# Altium PCB 2017-04-15_19-23-01.PcbDoc
Units mil, origin at the board's own origin, x right, y up, seen from the top; angles counter-clockwise.
Board outline 1785 x 1770 mil, 4 copper layers (Top Layer, MidLayer1, MidLayer2, Bottom Layer); 20 components, 13 nets, 47 pads, 26 vias.
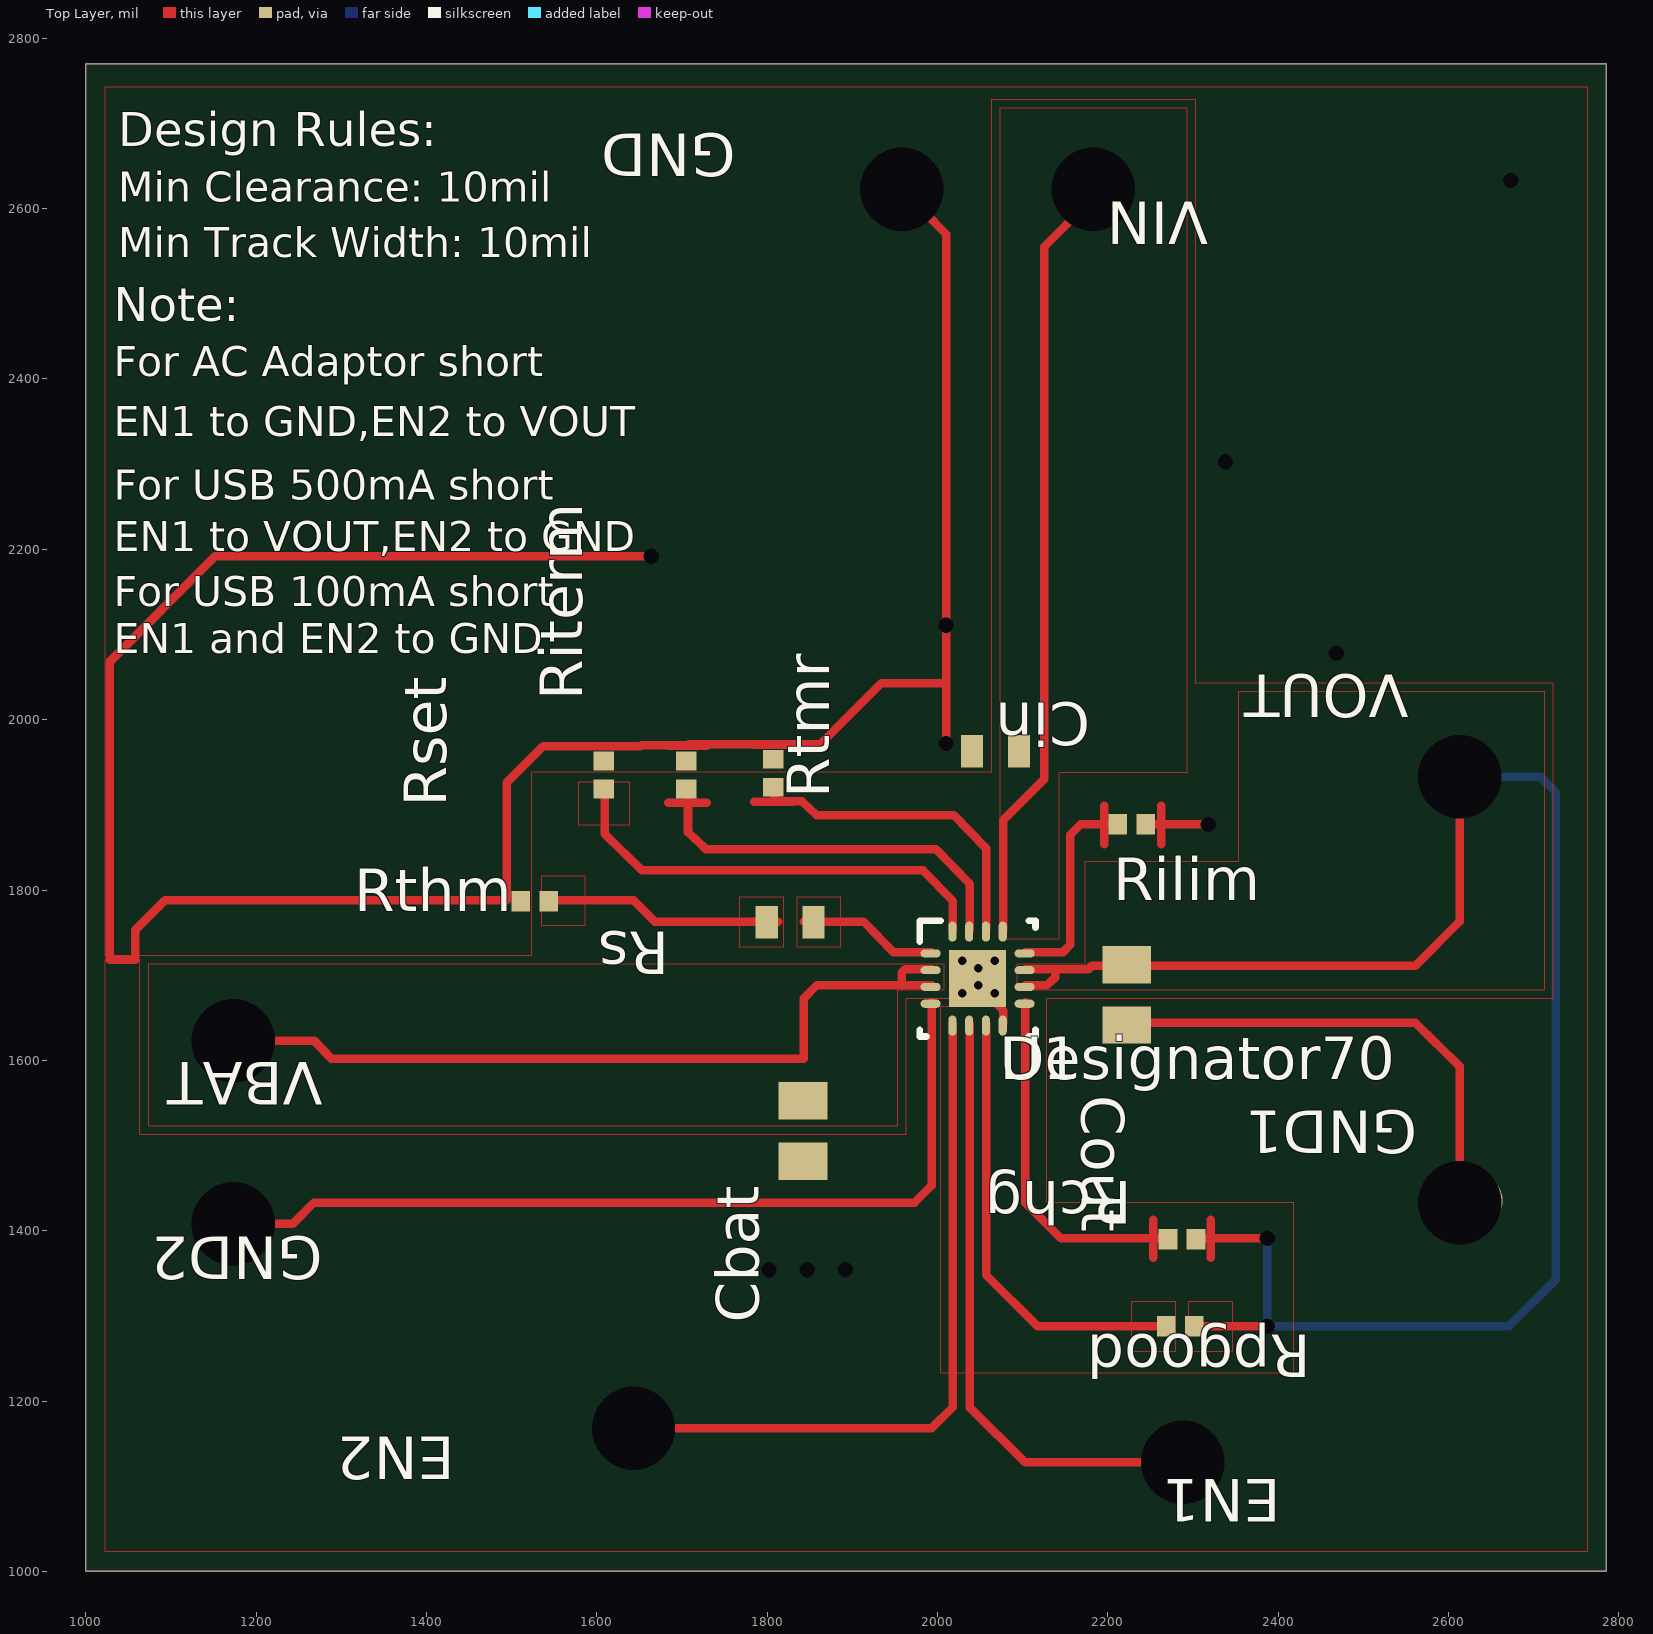
[diagram p0: Top Layer view]
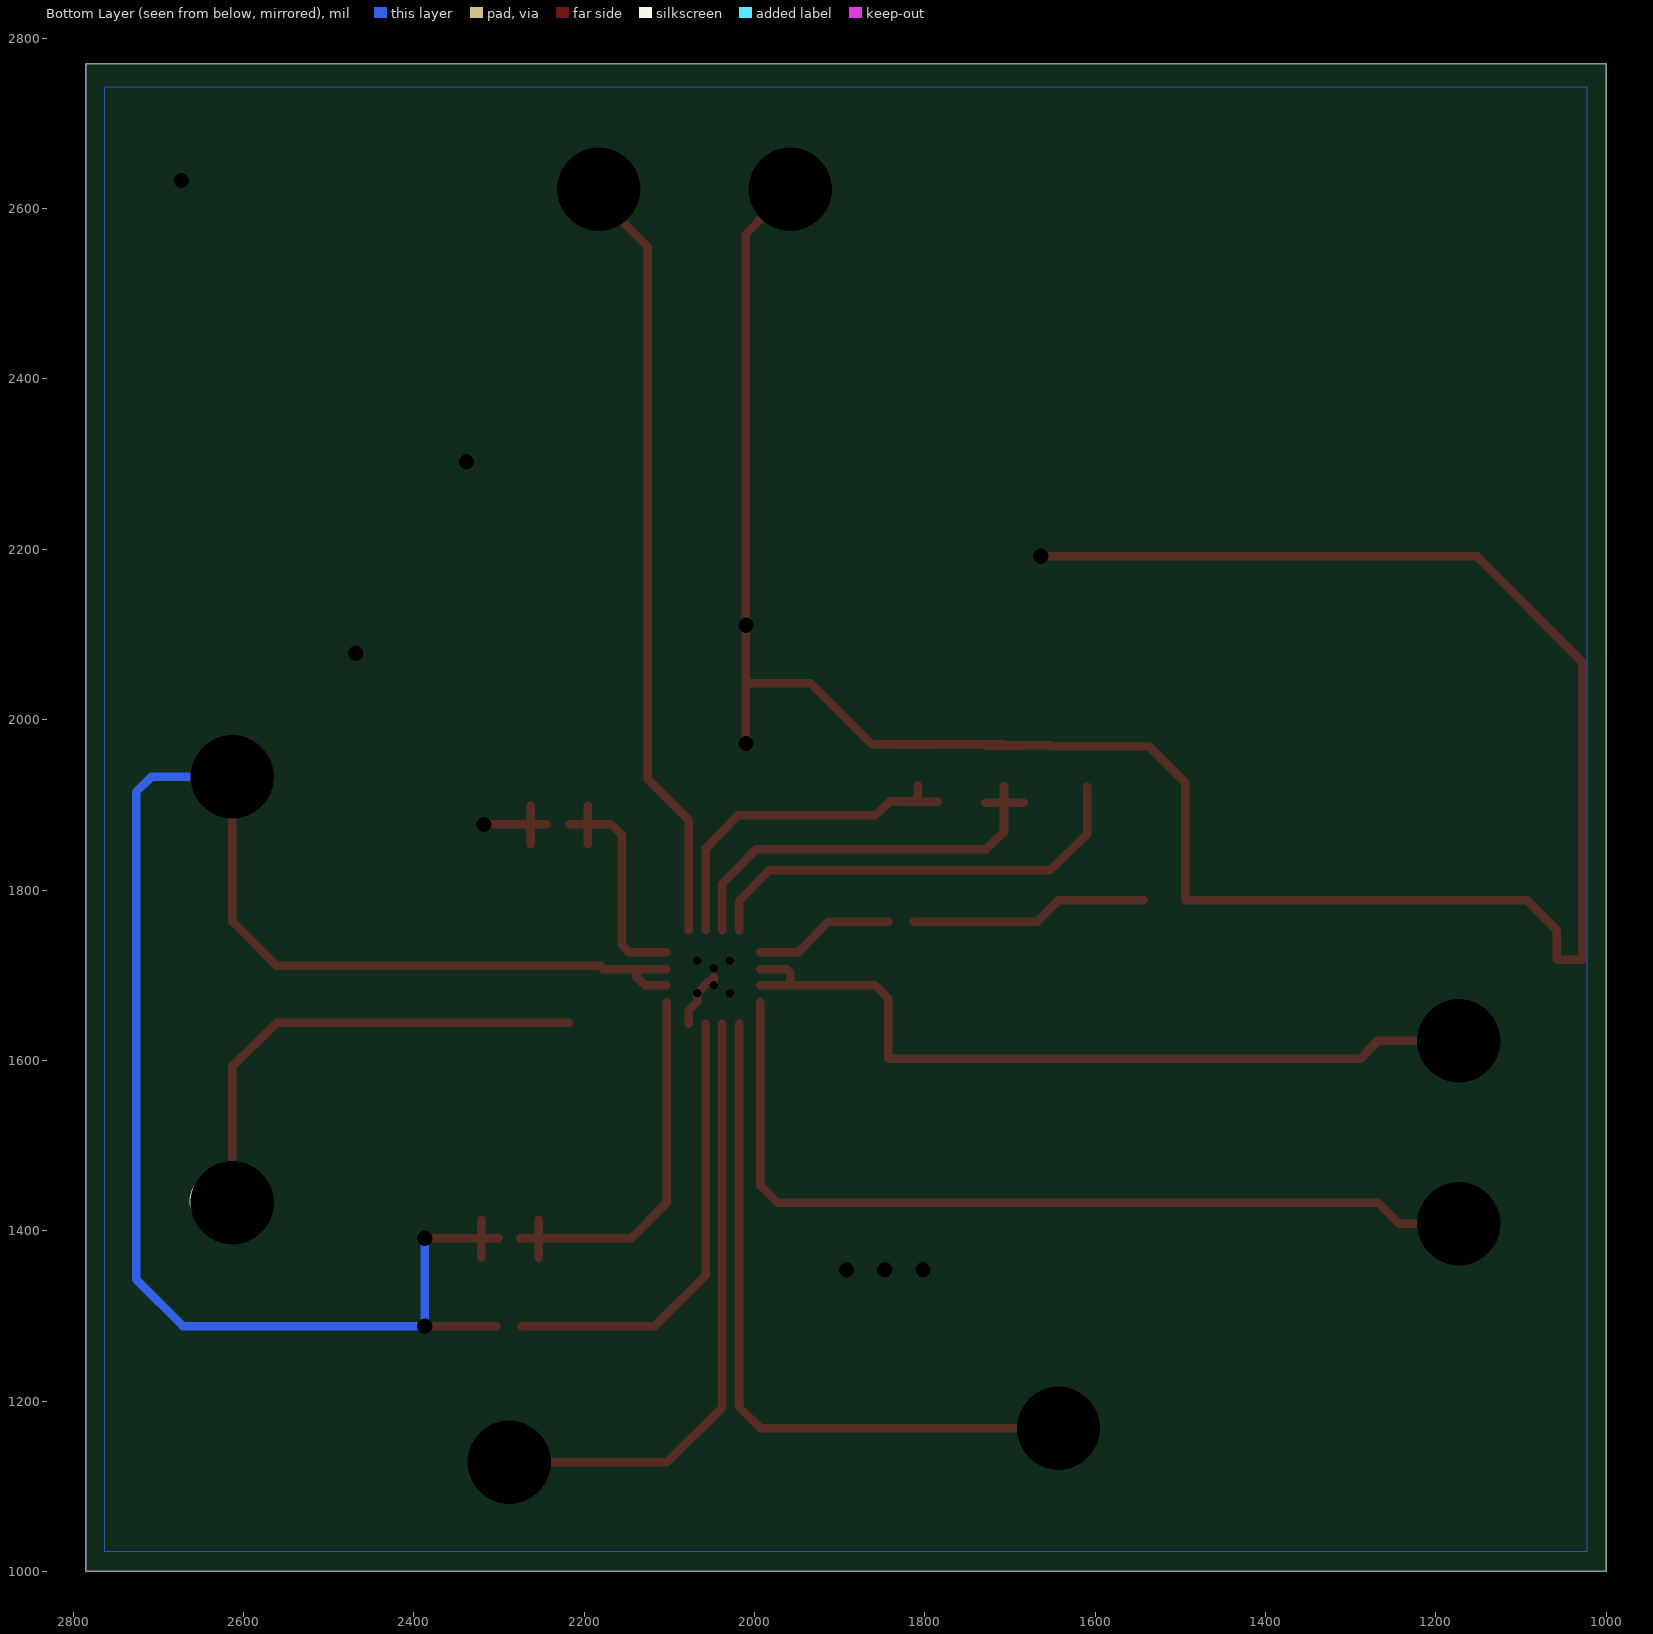
[diagram p1: Bottom Layer view, seen from below]

## Layer stack, top to bottom
Top Layer: signal copper 1.4
Dielectric: core 12.6, FR-4, Dk 4.8
MidLayer1: signal copper 1.4
Dielectric: prepreg 12.6, FR-4, Dk 4.8
MidLayer2: signal copper 1.4
Dielectric: core 12.6, FR-4, Dk 4.8
Bottom Layer: signal copper 1.4

## Board outline
1000,1000 2785,1000 2785,2770 1000,2770

## Design rules (kind name [scope] priority, off if disabled: settings)
PlaneConnect [All] p0: scope1count=1 scope1_0_kind=Board scope1_0_value=Board scope2count=1 scope2_0_kind=Board scope2_0_value=Board commentlength=0 planeconnectstyle=Direct reliefexpansion=20 reliefentries=4 reliefconductorwidth=10 reliefairgap=10
PlaneConnect [All] p1: planeconnectstyle=Direct reliefexpansion=20 reliefentries=4 reliefconductorwidth=10 reliefairgap=10
PolygonConnect [All] p0: scope1count=1 scope1_0_kind=Board scope1_0_value=Board scope2count=1 scope2_0_kind=Board scope2_0_value=Board commentlength=0 connectstyle=Direct reliefconductorwidth=10 reliefentries=4 polygonreliefangle="90 Angle"
PolygonConnect [All] p1: connectstyle=Direct reliefconductorwidth=10 reliefentries=4 polygonreliefangle="90 Angle"

## Components (designator, comment, footprint, x,y, rotation, side; value= is the part's Value field where it differs from the comment)
Cbat "" 0805 1842,1517 r90 top
Cin "" 0603 2068,1963 r180 top
Cout "" 0805 2222,1677 r270 top
EN1 "" TP-1502 2288,1122 r180 top
EN2 "" TP-1502 1638,1162 r180 top
GND "" TP-1502 1957,2622 r180 top
GND1 "" TP-1502 2631,1435 r180 top
GND2 "" TP-1502 1166,1407 r180 top
Rchg "" 0402 2287,1390 r180 top
Rilim "" 0402 2228,1877 r0 top
Riterm "" 0402 1705,1935 r90 top
Rpgood "" 0402 2285,1288 r180 top
Rs "" 0603 1827,1762 r180 top
Rset "" 0402 1608,1935 r90 top
Rthm "" 0402 1527,1787 r0 top
Rtmr "" 0402 1807,1937 r90 top
U1 "" RGT0016C 2047,1696 r0 top
VBAT "" TP-1502 1172,1622 r180 top
VIN "" TP-1502 2182,2622 r180 top
VOUT "" TP-1502 2612,1932 r180 top

## Footprints (in the part's own frame and the unit in brackets; to place one, negate y for a bottom-side part, rotate by r counter-clockwise, add the part's x,y. Pads: shape width x height; smd on the part's side, far side on the other; paste and mask are expansions set on the pad)
0402 [mil]
  rect 22x24 smd: 1(-16.5,0) 2(16.5,0)
0603 [mil]
  rect 26x38 smd: 1(-27.5,0) 2(27.5,0)
0805 [mil]
  rect 44x57 smd: 1(-35.5,0) 2(35.5,0)
RGT0016C [mm]
  oval 0.6x0.24 smd: 1(-1.4,0.75) 2(-1.4,0.25) 3(-1.4,-0.25) 4(-1.4,-0.75) 9(1.4,-0.75) 10(1.4,-0.25) 11(1.4,0.25) 12(1.4,0.75)
  oval 0.24x0.6 smd: 5(-0.75,-1.4) 6(-0.25,-1.4) 7(0.25,-1.4) 8(0.75,-1.4) 13(0.75,1.4) 14(0.25,1.4) 15(-0.25,1.4) 16(-0.75,1.4)
  rect 1.7x1.7 smd: 17(0,0)
  silkscreen extent -1.72,-1.73 1.72,1.73
TP-1502 [mil]
  round 65 / inner round 0 / far side round 65 hole 32: 1(0,0)

## Via types
v1: diameter 0, hole 18, Top Layer to Bottom Layer, 12 vias
v2: diameter 0, hole 98, Top Layer to Bottom Layer, 8 vias
v3: diameter 0, hole 10, Top Layer to Bottom Layer, 6 vias

## Nets (pads, with @x,y where several pads share a name; then routed paths per layer and width w, separated by ;. In a path a pad name is that pad's centre, name@x,y a point inside that pad or via, vN(x,y) a via of type N, cw(c..) or ccw(c..) an arc to the next point about the centre after c; other vN are vias at no path point)
0: Cbat.1 Cbat.2 Cin.2 Cout.2 GND1.1 GND2.1 GND.1 Rilim.2 Riterm.2 Rset.2 Rthm.1 Rtmr.2 U1.2 U1.3 U1.4 U1.8 U1.17 VBAT.1 | length 5790
  Top Layer w10: v2(1173,1408) 1243,1408 1268,1433 1843,1433 1973,1433 1993,1453 U1.4@1993,1668 ; v2(1173,1623) 1268,1623 1288,1602 1843,1602 1843,1673 1858,1688 1958,1688 ; v1(1664,2192) 1152,2192 1028,2068 1028,1718 1058,1718 1058,1753 1093,1788 1494,1788 1494,1926 1537,1969 1609,1969 1651,1969 1652,1970 1707,1970 1708,1971 1808,1971 1862,1971 1934,2043 2010,2043 ; 1684,1969.5 1729,1969.5 ; 1785,1970.5 1830,1970.5 ; v2(1958,2623) 2010,2570 v1(2010,2111) 2010,2043 ; U1.3@1993,1688 1958,1688 ; U1.2@1993,1707 1962,1707 1958,1703 1958,1688 ; v1(2010,1972) 2010,2043 ; v3(2048,1688) U1.17@2048,1698 ; U1.17@2053,1693 v3(2067,1679) 2067,1669 2075,1661 ; U1.8@2077,1643 2077,1658 ; Cout.2@2218,1644 2561,1644 2613,1593 v2(2613,1433) ; Rilim.2@2244,1877 2263,1877 v1(2318,1877) ; 2262.5,1854 2262.5,1899
  other v1: 1802,1354 1847,1354 1892,1354 2468,2078 2338,2303 2673,2633
  other v3: 2029,1679 2048,1708 2029,1717 2067,1717
1: Cout.1 Rchg.1 Rpgood.1 U1.10 U1.11 VOUT.1 | length 2124.9
  Top Layer w10: U1.10@2103,1688 2128,1688 2138,1697 2138,1707 ; U1.11@2103,1707 2138,1707 ; Rchg.1@2300,1391 2321,1391 v1(2387,1391) ; Rpgood.1@2303,1288 2321,1288 v1(2387,1288) ; 2320.5,1368 2320.5,1413 ; v2(2613,1933) 2613,1763 2561,1711 2218,1711 2181,1711 2177,1707 2138,1707
  Bottom Layer w10: v1(2387,1391) v1(2387,1288) 2671,1288 2726,1343 2726,1915 2708,1933 v2(2613,1933)
11: Rs.1 U1.1 | length 165.2
  Top Layer w10: Rs.1@1843,1763 1861,1763 1913,1763 1948,1727 U1.1@1993,1727
12: EN1.1 U1.6 | length 727.2
  Top Layer w10: U1.6@2038,1643 2038,1192 2103,1128 v2(2288,1128)
14: Rtmr.1 U1.14 | length 431.8
  Top Layer w10: 1785,1903.5 1830,1903.5 ; Rtmr.1@1808,1923 1808,1904 1841,1904 1858,1888 2019,1888 2057,1849 U1.14@2057,1753
15: Rpgood.2 U1.7 | length 535.9
  Top Layer w10: U1.7@2057,1643 2057,1348 2117,1288 2254,1288 Rpgood.2@2273,1288
16: EN2.1 U1.5 | length 835.4
  Top Layer w10: v2(1643,1168) 1993,1168 2018,1193 U1.5@2018,1643
17: Rilim.1 U1.12 | length 296.7
  Top Layer w10: U1.12@2103,1727 2147,1727 2156,1736 2156,1865 2168,1877 2196,1877 Rilim.1@2217,1877 ; 2195.5,1854 2195.5,1899
18: Riterm.1 U1.15 | length 509.3
  Top Layer w10: 1684,1902.5 1729,1902.5 ; Riterm.1@1707,1922 1707,1903 1707,1868 1728,1848 1998,1848 2038,1807 U1.15@2038,1753
19: Cin.1 U1.13 VIN.1 | length 913.9
  Top Layer w10: U1.13@2077,1753 2077,1882 2125,1930 2125,2043 2125,2555 2183,2613 v2(2183,2623)
20: Rset.1 U1.16 | length 530.7
  Top Layer w10: Rset.1@1609,1921 1609,1902 1609,1866 1653,1823 1983,1823 2018,1787 U1.16@2018,1753
21: Rchg.2 U1.9 | length 469.4
  Top Layer w10: U1.9@2103,1668 2103,1433 2145,1391 2254,1391 Rchg.2@2275,1391 ; 2253.5,1368 2253.5,1413
22: Rs.2 Rthm.2 | length 280.4
  Top Layer w10: Rthm.2@1543,1788 1561,1788 1643,1788 1668,1763 1794,1763 1813,1763

## Polygon pours and split planes (outlines as drawn)
22 on Top Layer " " (solid, pour order 0): 1535,1758 1535,1817 1586,1817 1586,1758
20 on Top Layer " " (solid, pour order 1): 1579,1876 1579,1927 1638,1927 1638,1876
11 on Top Layer " " (solid, pour order 2): 1835,1733 1835,1792 1886,1792 1886,1733
22 on Top Layer " " (solid, pour order 3): 1768,1733 1768,1792 1819,1792 1819,1733
1 on Top Layer " " (solid, pour order 4): 2295,1258 2295,1317 2346,1317 2346,1258
15 on Top Layer " " (solid, pour order 5): 2228,1258 2228,1317 2279,1317 2279,1258
1 on Top Layer " " (solid, pour order 6): 2093,1683 2713,1683 2713,2033 2353,2033 2353,1833 2173,1833 2173,1713 2093,1713
19 on Top Layer " " (solid, pour order 7): 2073,2718 2073,1743 2143,1743 2143,1938 2293,1938 2293,2718
0 on Top Layer " " (solid, pour order 9): 1023,1718 1063,1718 1063,1513 1963,1513 1963,1673 2018,1673 2018,1728 2078,1728 2078,1663 2003,1663 2003,1233 2418,1233 2418,1433 2128,1433 2128,1673 2723,1673 2723,2043 2303,2043 2303,2728 2063,2728 2063,1938 1523,1938 1523,1723 1023,1723 1023,2743 2763,2743 2763,1023 1023,1023
0 on Top Layer " " (solid, pour order 10): 1073,1713 1073,1523 1953,1523 1953,1683 2008,1683 2008,1713
0 on Bottom Layer " " (solid, pour order 8): 1023,2743 1023,1023 2763,1023 2763,2743

## Other copper
Multi-Layer:
  the board outline again, w1

## Silkscreen, mask and mechanical layers (free items; w line width, h text height)
Top Overlay:
  text "Design Rules:" at 1038,2673 h40
  text "Min Clearance: 10mil" at 1038,2608 h35
  text "Min Track Width: 10mil" at 1038,2543 h35
  text "Note:" at 1033,2468 h40
  text "For AC Adaptor short" at 1033,2403 h35
  text "EN1 to GND,EN2 to VOUT" at 1033,2333 h35
  text "For USB 500mA short" at 1033,2258 h35
  text "EN1 to VOUT,EN2 to GND" at 1033,2198 h35
  text "For USB 100mA short" at 1033,2133 h35
  text "EN1 and EN2 to GND" at 1033,2078 h35

## Text inside footprints (layer, text, board x,y; h text height)
U1: Top Overlay "Designator70" at 2073,1578 h50